# Altium PCB Bemine-neo_PCB.PcbDoc
Units mm, origin at the board's own origin, x right, y up, seen from the top; angles counter-clockwise.
Board outline 55.36 x 47 mm, 2 copper layers (Top Layer, Bottom Layer); 42 components, 31 nets, 174 pads, 26 vias.
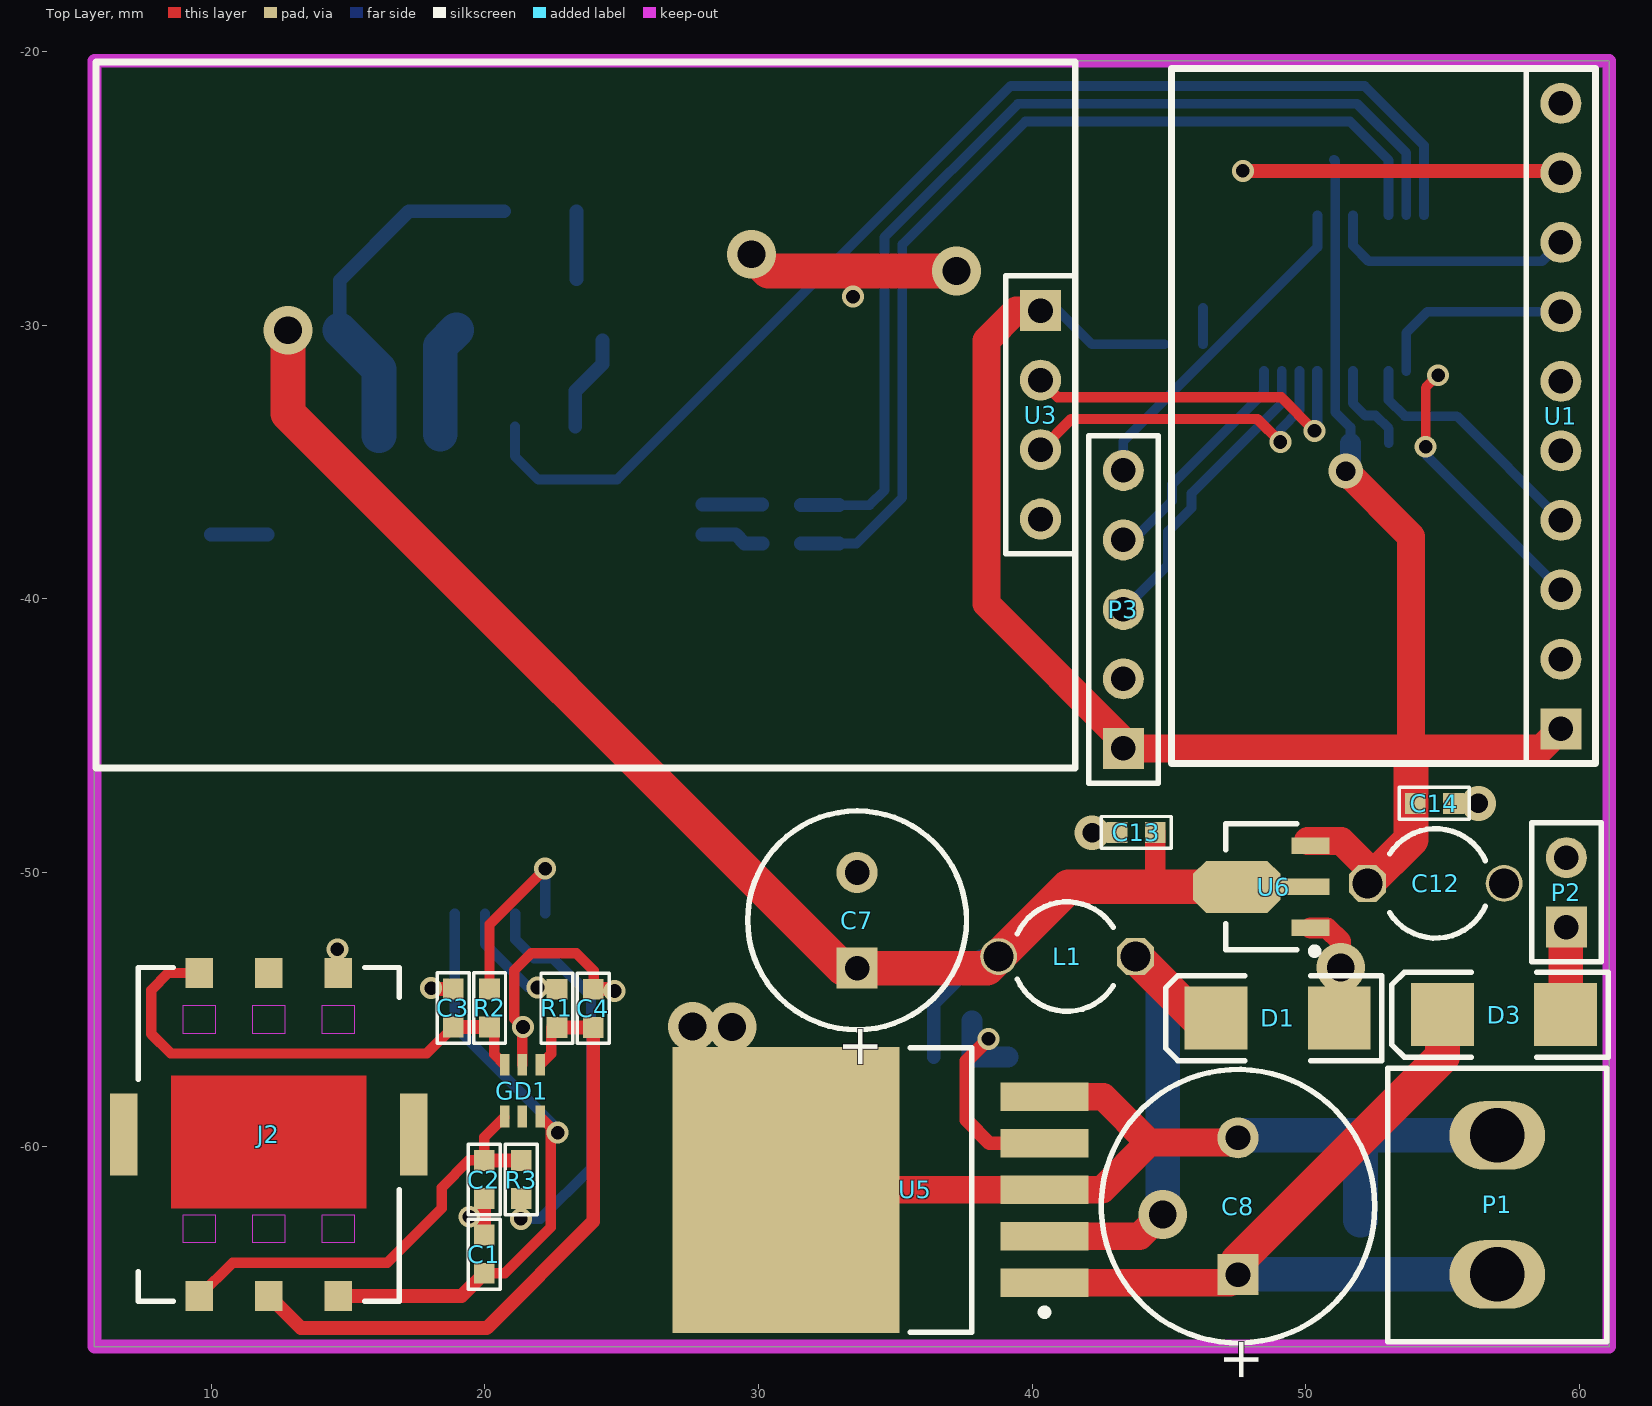
[diagram p0: Top Layer view]
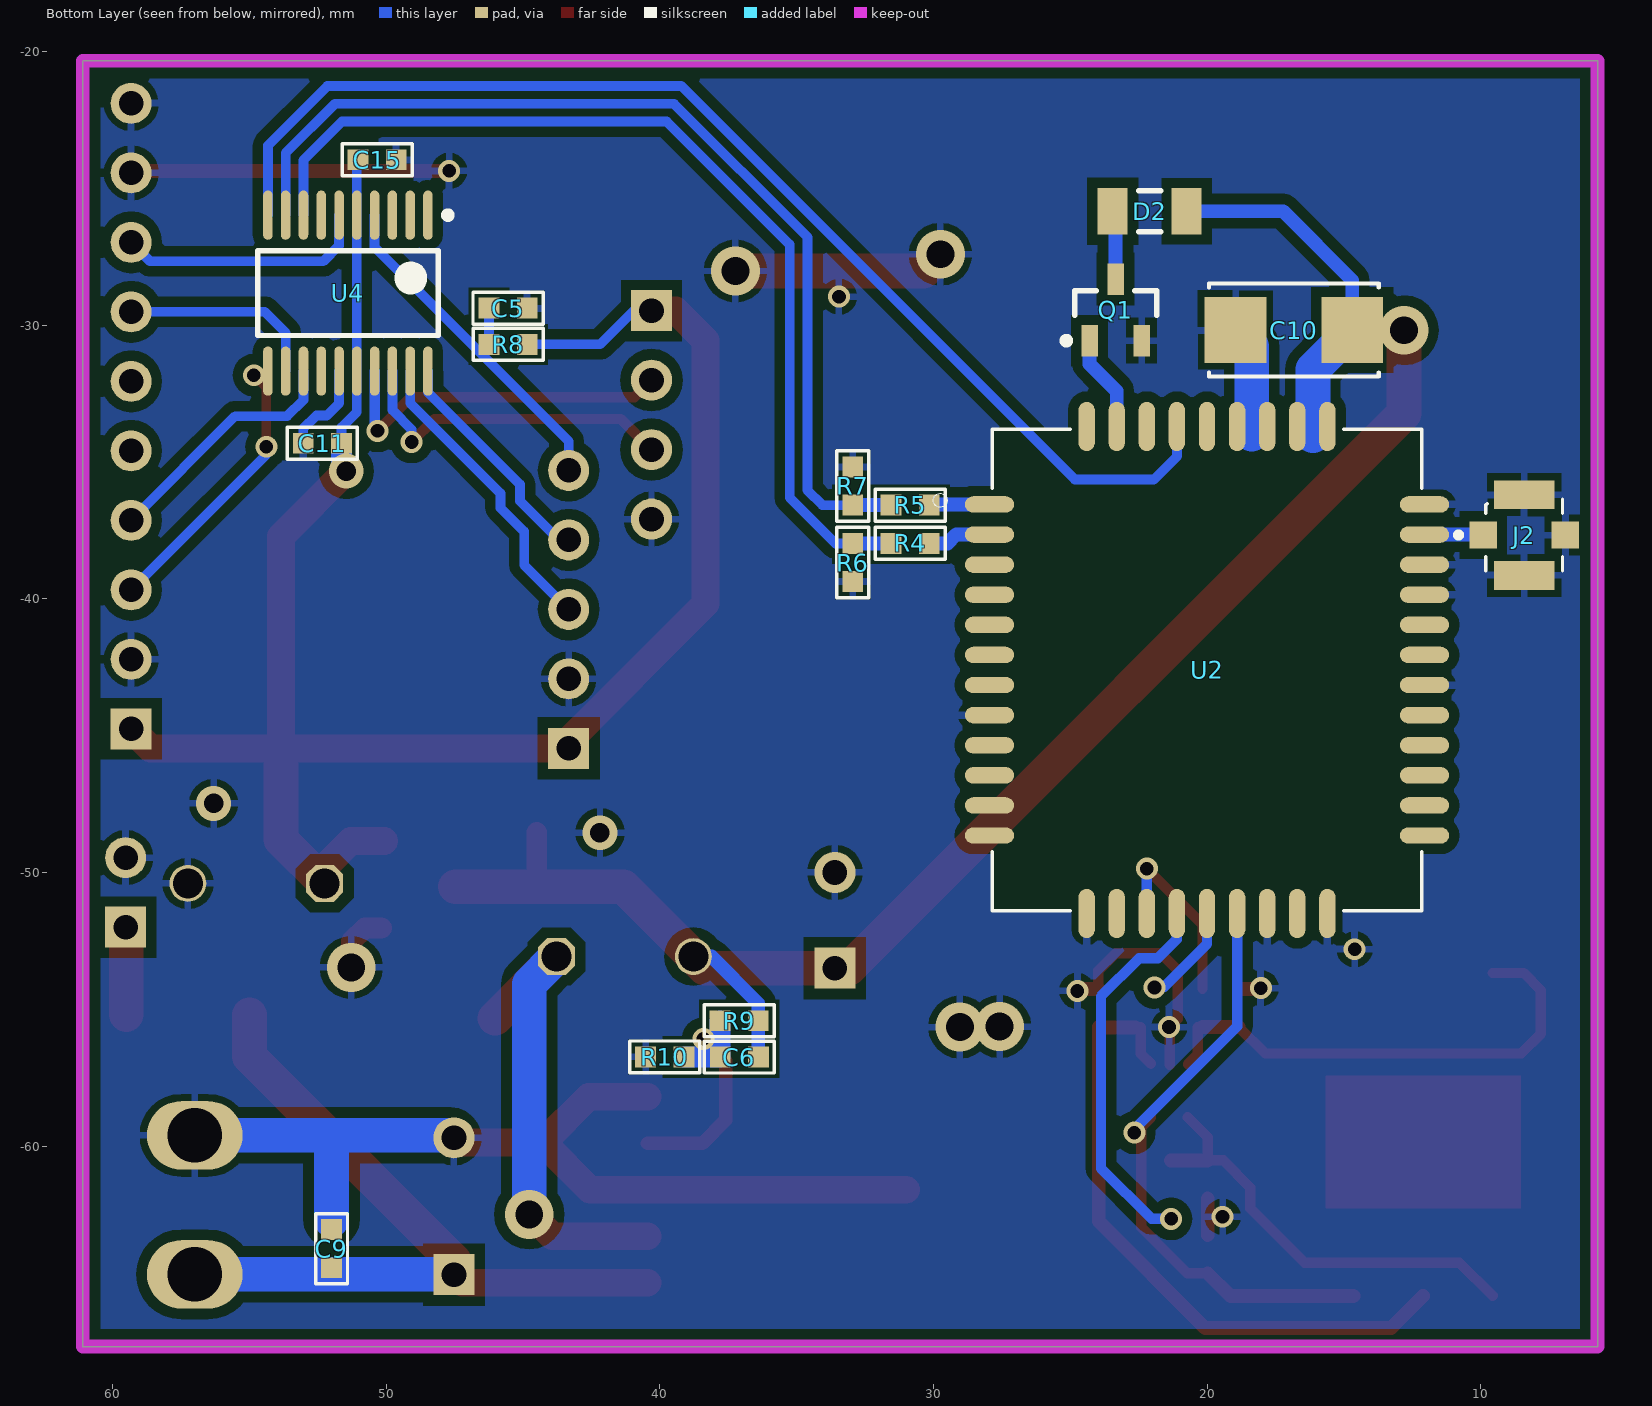
[diagram p1: Bottom Layer view, seen from below]

## Layer stack, top to bottom
Top Solder: solder mask 0.0102, Solder Resist, Dk 3.5
Top Layer: signal copper 0.0356
Dielectric 1: dielectric 0.32, FR-4, Dk 4.8
Bottom Layer: signal copper 0.0356
Bottom Solder: solder mask 0.0102, Solder Resist, Dk 3.5

## Board outline
5.727,-67.334 61.091,-67.334 61.091,-20.334 5.727,-20.334

## Design rules (kind name [scope] priority, off if disabled: settings)
Clearance Polygon [(InNamedPolygon('Top Layer-GND')) or (InNamedPolygon('Bottom Layer-GND'))] p1: gap=0.381
Clearance "Keep-Out Layer" [OnLayer('Keep-Out Layer')] p2: gap=0
Clearance [All] p3: gap=0.254
ComponentClearance [All] p1 off: gap=0.254 collisioncheckmode=3 verticalgap=0.254 showdistances=FALSE
PolygonConnect [All] p1: connectstyle=Relief reliefconductorwidth=0.254 reliefentries=4 polygonreliefangle="90 Angle" airgapwidth=0.254
RoutingVias [All] p1: holewidth=0.711 width=1.27 viastyle="Through Hole" minholewidth=0.711 minwidth=1.27 maxholewidth=0.711 maxwidth=1.27
SolderMaskExpansion [All] p1: expansion=0.102
Width [All] p1: maxlimit=1.27 minlimit=0.254 preferedwidth=0.254
29 further rules are at their usual default settings.

## Components (designator, comment, footprint, x,y, rotation, side; value= is the part's Value field where it differs from the comment)
C1 "100nF" 0603R-1k 19.975,-64.65 r90 top
C2 "33pF" 0603R-1k 19.975,-60.525 r270 top
C3 "33pF" 0603R-1k 18.841,-55.652 r90 top
C4 "33pF" 0603R-1k 23.956,-55.664 r90 top
C5 "100nF" 0603R-1k 46.245,-29.373 r180 bottom
C6 "15nF" 0603R-1k 37.793,-56.747 r180 bottom
C7 "470 μF; 25 V" E 33.6,-51.75 r90 top
C8 "1000uF 16V" F 47.525,-62.2 r90 top
C9 "100nF" 0603R-1k 52,-64.45 r90 bottom
C10 "10uF; 25V" CAPCP6032X280N 16.825,-30.175 r0 bottom
C11 "100nF" 0603R-1k 51.638,-34.315 r0 bottom
C12 "4.7 μF; 16V" CAPR5-4X5 54.75,-50.4 r0 top
C13 "100nF" 0603R-1k 44.501,-48.539 r180 top
C14 "100nF" 0603R-1k 54,-47.475 r0 top
C15 "100nF" 0603R-1k 51.029,-23.952 r180 bottom
D1 "SM5822" SMB 48.975,-55.325 r180 top
D2 "LED2" C1206 22.098,-25.832 r0 bottom
D3 "Diode" SMB 57.25,-55.2 r180 top
GD1 "SMF05C.TCT" SC70-6 21.369,-57.977 r180 top
J2 "1661" MOLEX_1661 8.407,-37.668 r270 bottom
J2 "SIM8050-6-0-14-00-X_revF" SIM8050-6-0-14-00-X_revF 12.1,-59.575 r0 top
L1 "68uH 3.1A (47 33)" CAPR5-4X5 41.275,-53.075 r180 top
P1 "12v_Power" phoenix-2pin-200mil 57,-62.15 r90 top
P2 "Battery Pins" HDR1X2 59.525,-52 r90 top
P3 "Programmer" HDR1X5 43.332,-45.466 r90 top
Q1 "N-channel MOSFET" SOT23 23.343,-29.439 r180 bottom
R1 "51" 0603R-1k 22.631,-55.664 r90 top
R2 "51" 0603R-1k 20.166,-55.652 r90 top
R3 "51" 0603R-1k 21.325,-60.525 r270 top
R4 "1K" 0603R-1k 30.15,-37.975 r0 bottom
R5 "1K" 0603R-1k 31.55,-36.575 r180 bottom
R6 "5.6K" 0603R-1k 32.95,-37.975 r270 bottom
R7 "5.6K" 0603R-1k 32.95,-36.575 r90 bottom
R8 "10K" 0603R-1k 44.845,-30.698 r0 bottom
R9 "4.7k; 1%" 0603R-1k 36.403,-55.42 r0 bottom
R10 "1k; 1%" 0603R-1k 39.123,-56.745 r0 bottom
U1 "mpu9250-module" mpu9250-module 59.325,-44.75 r180 top
U2 "SIM800C" LCC110P1570X1760X250-42N 20,-42.6 r180 bottom
U3 "NEO7-module" NEO7-module 41.575,-46.175 r90 top
U4 "STM32F030F4P6" STM-TSSOP20_N 51.4,-28.825 r270 bottom
U5 "LM2596S-ADJ" TS5B_N 34.45,-61.6 r180 top
U6 "AIC1734-33XA" SOT89N 48.375,-50.525 r180 top

## Footprints (in the part's own frame and the unit in brackets; to place one, negate y for a bottom-side part, rotate by r counter-clockwise, add the part's x,y. Pads: shape width x height; smd on the part's side, far side on the other; paste and mask are expansions set on the pad)
0603R-1k [mil] "RESISTOR 0603"
  rect 30x30 smd: 1(0,0) 2(55,0)
  silkscreen extent -23,-23 78,23, body extent -4,-15 59,15, height 20
C1206 [mm]
  rect 1.1x1.7 smd: 1(-1.35,0) 2(1.35,0)
  silkscreen extent -0.4,-0.75 0.4,0.75, body extent -1.7,-0.9 1.7,0.9, height 1.3
CAPCP6032X280N [mil]
  rect 89x95 smd: 1(-84,0) 2(84,0)
  silkscreen extent -122,-67 122,67
CAPR5-4X5 [mm]
  oct 1.35x1.35 hole 1.1: 1(-2.5,0)
  round 1.35 hole 1.1: 2(2.5,0)
  silkscreen extent -1.69,-2 1.82,2
E [mm] "Capacitor, Electrolytic, Radial; Body 8 x 10.5 mm (Dia.xH typ); Pin Spacing 3.5 mm (typ)"
  rect 1.5x1.5 hole 0.9: 1(-1.75,0)
  round 1.5 hole 0.9: 2(1.75,0)
  silkscreen extent -4,-4 4,4
F [mm] "Capacitor, Electrolytic, Radial; Body 10 x 10.5 mm (Dia.xH typ); Pin Spacing 5 mm (typ)"
  rect 1.5x1.5 hole 0.9: 1(-2.5,0)
  round 1.5 hole 0.9: 2(2.5,0)
  silkscreen extent -5,-5 5,5
HDR1X2 [mm] "Connector; Header; 2 Position"
  rect 1.5x1.5 hole 0.9: 1(0,0)
  round 1.5 hole 0.9: 2(2.54,0)
  silkscreen extent -1.27,-1.27 3.81,1.27
HDR1X5 [mm] "Connector; Header; 5 Position"
  rect 1.5x1.5 hole 0.9: 1(0,0)
  round 1.5 hole 0.9: 2(2.54,0) 3(5.08,0) 4(7.62,0) 5(10.16,0)
  silkscreen extent -1.27,-1.27 11.43,1.27
LCC110P1570X1760X250-42N [mm]
  oval 1.8x0.6 smd: 1(-7.95,6.05) 2(-7.95,4.95) 3(-7.95,3.85) 4(-7.95,2.75) 5(-7.95,1.65) 6(-7.95,0.55) 7(-7.95,-0.55) 8(-7.95,-1.65) 9(-7.95,-2.75) 10(-7.95,-3.85) 11(-7.95,-4.95) 12(-7.95,-6.05) 22(7.95,-6.05) 23(7.95,-4.95) 24(7.95,-3.85) 25(7.95,-2.75) 26(7.95,-1.65) 27(7.95,-0.55) 28(7.95,0.55) 29(7.95,1.65) 30(7.95,2.75) 31(7.95,3.85) 32(7.95,4.95) 33(7.95,6.05)
  oval 0.6x1.8 smd: 13(-4.4,-8.9) 14(-3.3,-8.9) 15(-2.2,-8.9) 16(-1.1,-8.9) 17(0,-8.9) 18(1.1,-8.9) 19(2.2,-8.9) 20(3.3,-8.9) 21(4.4,-8.9) 34(4.4,8.9) 35(3.3,8.9) 36(2.2,8.9) 37(1.1,8.9) 38(0,8.9) 39(-1.1,8.9) 40(-2.2,8.9) 41(-3.3,8.9) 42(-4.4,8.9)
  silkscreen extent -10,-8.8 7.85,8.8
MOLEX_1661 [mm]
  rect 1x1 smd: 1(0,-1.5) 3(0,1.5)
  rect 1.05x2.2 smd: 2(-1.475,0) 4(1.475,0)
  silkscreen extent -1.3,-2.5 1.3,1.4
mpu9250-module [mm]
  rect 1.5x1.5 hole 0.9: 1(0,0)
  round 1.5 hole 0.9: 2(0,-2.54) 3(0,-5.08) 4(0,-7.62) 5(0,-10.16) 6(0,-12.7) 7(0,-15.24) 8(0,-17.78) 9(0,-20.32) 10(0,-22.86)
  silkscreen extent -1.27,-24.13 14.23,1.27
NEO7-module [mm]
  rect 1.5x1.5 hole 0.9: 1(16.71,1.27)
  round 1.5 hole 0.9: 2(14.17,1.27) 3(11.63,1.27) 4(9.09,1.27)
  silkscreen extent 0,0 25.8,35.8
phoenix-2pin-200mil [mm]
  oval 2.5x3.5 hole 2: 1(-2.54,0) 2(2.54,0)
  silkscreen extent -5,-4 5,4
SC70-6 [mm]
  rect 0.35x0.8 smd: 1(-0.65,-0.95) 2(0,-0.95) 3(0.65,-0.95) 4(0.65,0.95) 5(0,0.95) 6(-0.65,0.95)
SIM8050-6-0-14-00-X_revF [mm]
  rect 1x1.1 smd: C1(2.54,-5.9) C2(0,-5.9) C3(-2.54,-5.9) C5(2.54,5.9) C6(0,5.9) C7(-2.54,5.9)
  rect 1x3 smd: C4(5.3,0) C8(-5.3,0)
  Top Layer region: -3.575,-2.7 3.575,-2.7 3.575,2.15 -3.575,2.15
  Top Layer keep-out region: 1.94,-3.95 3.14,-3.95 3.14,-2.95 1.94,-2.95
  Top Layer keep-out region: -0.6,-3.95 0.6,-3.95 0.6,-2.95 -0.6,-2.95
  Top Layer keep-out region: -3.14,-3.95 -1.94,-3.95 -1.94,-2.95 -3.14,-2.95
  Top Layer keep-out region: -3.14,3.7 -1.94,3.7 -1.94,4.7 -3.14,4.7
  Top Layer keep-out region: -0.6,3.7 0.6,3.7 0.6,4.7 -0.6,4.7
  Top Layer keep-out region: 1.94,3.7 3.14,3.7 3.14,4.7 1.94,4.7
  silkscreen extent -4.77,-6.1 4.77,6.1, body extent -5.42,-6.1 5.42,6.1, height 1.34
SMB [mm]
  rect 2.3x2.3 smd: 1(-2.25,0) 2(2.25,0)
  silkscreen extent -3.8,-1.55 4.1,1.55
SOT23 [mm]
  rect 0.6x1.15 smd: 1(-0.95,-1.125) 2(0.95,-1.125) 3(0,1.125)
  silkscreen extent -1.92,-1.25 1.5,0.7, body extent -1.5,-0.7 1.5,0.7, height 1.1
SOT89N [mm]
  rect 1.4x0.6 smd: 1(-1.8,1.5) 3(-1.8,-1.5)
  rect 1.8x0.6 smd: 2(-1.6,0)
  oct 3.2x1.9 smd: 2(0.9,0)
  silkscreen extent -2.07,-2.3 1.3,2.47, body extent -1.3,-2.3 1.3,2.3, height 1.6
STM-TSSOP20_N [mm] "SOP, 20-Leads, Body 6.6x4.5mm, Pitch 0.65mm, IPC Medium Density"
  oval 1.8x0.35 smd: 1(-2.85,2.925) 2(-2.85,2.275) 3(-2.85,1.625) 4(-2.85,0.975) 5(-2.85,0.325) 6(-2.85,-0.325) 7(-2.85,-0.975) 8(-2.85,-1.625) 9(-2.85,-2.275) 10(-2.85,-2.925) 11(2.85,-2.925) 12(2.85,-2.275) 13(2.85,-1.625) 14(2.85,-0.975) 15(2.85,-0.325) 16(2.85,0.325) 17(2.85,0.975) 18(2.85,1.625) 19(2.85,2.275) 20(2.85,2.925)
  silkscreen extent -2.97,-3.3 1.55,3.77, body extent -2.25,-3.3 2.25,3.3, height 1.2
TS5B_N [mm]
  rect 3.2x1.05 smd: 1(-6,3.4) 2(-6,1.7) 3(-6,0) 4(-6,-1.7) 5(-6,-3.4)
  rect 8.3x10.45 smd: 6(3.45,0)
  silkscreen extent -6.13,-5.2 -1.1,5.2, body extent -3.35,-5.2 6.05,5.2, height 4.65

## Part data
C1 C2 C3 C4 C5 C9 C11 C13 C14 C15: library part Cap-Bipolar, "Bipolar Capacitor"
C6 C10: library part Cap, "Capacitor"
C7: library part 94SH107X0016EBP, "Solid Aluminum Capacitor with Organic Semiconductor Electrolyte: 100uF, 16V, Bulk Pack"
C8: library part 94SS477X0004FBP, "Solid Aluminum Capacitor with Organic Semiconductor Electrolyte: 470uF, 4V, Bulk Pack"
C12: library part "WCAP-PSLP 5x5.8x1.4 875105359003", "WCAP-PSLP Aluminum Polymer Capacitors , 22 ?F; + / - 20%; 16 V , 5 x 5,8"
D1: library part "D Schottky", "Schottky Diode"
D2: "Typical RED, GREEN, YELLOW, AMBER GaAs LED"
D3: "Default Diode"
J2: "uFL SMT Antenna Connector"
J2: "Nano SIM Card Connector, Push-Pull Type, 6 Pin, SMT, Profile 1.35mm"
L1: library part Inductor, "Inductor"
P1 P2: library part "Header 2", "Header, 2-Pin"
P3: library part "Header 5", "Header, 5-Pin"
Q1: library part 2N7002, "NPN transistor"
R1 R2 R3 R4 R5 R6 R7 R8 R9 R10: library part Resistor, "Resistor"
U2: "Module: GSM/Bluetooth; GPRS; 2G; 1800MHz, 900MHz; 85.6kbps; SMD"
U4: "ARM Cortex-M0 32-bit MCU, 16 KB Flash, 4 KB Internal RAM, 15 I/Os, 20-pin TSSOP, -40 to 85 degC, Tube"
U5: "SIMPLE SWITCHER® Power Converter 150 KHz 3A Step-Down Voltage Regulator, 5-pin TO-263"
U6: library part HT7530-1, "3.0V 100mA Low Power,  Low Dropout Voltage (LDO) Regulator"

## Via types
v1: diameter 0.8, hole 0.5, Top Layer to Bottom Layer, 16 vias
v2: diameter 1.778, hole 1.016, Top Layer to Bottom Layer, 7 vias
v3: diameter 1.27, hole 0.711, Top Layer to Bottom Layer, 3 vias

## Nets (pads, with @x,y where several pads share a name; then routed paths per layer and width w, separated by ;. In a path a pad name is that pad's centre, name@x,y a point inside that pad or via, vN(x,y) a via of type N, cw(c..) or ccw(c..) an arc to the next point about the centre after c; other vN are vias at no path point)
GND: C1.2 C2.2 C3.2 C4.2 C5.2 C7.2 C8.2 C9.2 C10.2 C11.2 C12.2 C13.2 C14.2 C15.2 D1.1 GD1.2 J2.2 J2.3 J2.4 J2.C5 P1.2 P2.2 P3.2 Q1.2 R6.2 R7.2 R10.2 U1.2 U1.9 U1.10 U2.8 U2.13 U2.19 U2.21 U2.27 U2.30 U2.31 U2.33 U2.36 U2.37 U3.4 U4.15 U5.3 U5.5 U5.6 U6.1 | length 73.8
  Top Layer w0.381: GD1.2 v1@21.369,-55.669 ; v1(21.387,-55.651) 21.076,-55.34 21.076,-53.575 21.692,-52.959 23.343,-52.959 23.978,-53.594 C4.2@23.978,-54.153
  Top Layer w0.508: v1@18.085,-54.255 C3.2 ; C1.2 C2.2 ; C4.2 v1@24.727,-54.267 ; v1(47.701,-24.359) 59.254,-24.359 U1.9
  Top Layer w0.762: U6.1 50.777,-52.025 51.281,-52.529 v2(51.281,-53.473)
  Top Layer w1.016: U5.6 U5.3 42.55,-61.6 44.275,-59.875 ; U5.5 42.6,-58.2 44.275,-59.875 ; C8.2 47.35,-59.875 44.275,-59.875
  Top Layer w1.27: v2(29.743,-27.407) 30.353,-28.016 v2(37.236,-28.016)
  Bottom Layer w0.356: U4.15 51.725,-32.853 52.172,-33.299 52.553,-33.299 53.035,-33.782 C11.2
  Bottom Layer w1.27: 18.364,-33.985 18.364,-30.769 C10.2 ; C8.2@47.615,-59.61 P1.2 ; C9.2@52,-62.7 52,-59.66
  other v1: 19.431,-62.586 24.74,-54.331 18.034,-54.229 14.605,-52.807 33.452,-28.956
  other v2: 29.032,-55.651 27.583,-55.632
  other v3: 42.188,-48.546 56.31,-47.479
INT: U1.8 U4.6 | length 9.2
  Bottom Layer w0.356: U4.6 51.725,-27.087 52.299,-27.661 58.634,-27.661 U1.8
MISO: U1.7 U4.12 | length 7.4
  Bottom Layer w0.356: U4.12 53.675,-30.272 54.437,-29.51 U1.7
MOSI: U1.4 U4.13 | length 9.2
  Bottom Layer w0.356: U4.13 53.025,-32.73 53.619,-33.325 55.52,-33.325 U1.4
NetC2_1: C2.1 GD1.4 J2.C3 R3.1 | length 16.1
  Top Layer w0.381: J2.C3 10.773,-64.262 16.434,-64.262 18.415,-62.281 18.415,-61.519 19.409,-60.525 C2.1 19.975,-59.671 GD1.4@20.697,-58.949
  Top Layer w0.508: C2.1 R3.1
NetC3_1: C3.1 GD1.3 J2.C7 R2.1 | length 18.2
  Top Layer w0.381: J2.C7 8.428,-53.675 7.798,-54.305 7.798,-55.905 8.509,-56.617 17.877,-56.617 C3.1 ; R2.1@20.344,-55.652 20.344,-56.652 GD1.3@20.695,-57.003
  Top Layer w0.508: C3.1 R2.1
NetC4_1: C4.1 GD1.1 J2.C2 R1.1 | length 23.9
  Top Layer w0.381: GD1.1@22.048,-56.998 22.419,-56.627 R1.1@22.419,-55.652
  Top Layer w0.508: J2.C2 13.275,-66.65 20.066,-66.65 23.956,-62.759 C4.1@23.956,-55.651 ; R1.1 C4.1
NetC6_1: C6.1 R9.2 R10.1 U5.4 | length 9.2
  Top Layer w0.508: v1(38.405,-56.083) 37.592,-56.896 37.592,-59.055 38.437,-59.9 U5.4
  Bottom Layer w0.762: R9.2 37.8,-56.74 R10.1@39.118,-56.74
NetD1_2: D1.2 L1.1 U5.2 | length 17.7
  Top Layer w1.016: U5.2 43.925,-63.3 v2@44.75,-62.475
  Top Layer w1.27: L1.1 D1.2@46.025,-55.325
  Bottom Layer w1.27: L1.1 44.775,-54.075 v2(44.775,-62.5)
NetD2_2: D2.2 Q1.3 | length 2.5
  Bottom Layer w0.508: Q1.3 D2.2@23.343,-25.832
NetD3_1: D3.1 P2.1 | length 3.2
  Top Layer w1.27: D3.1 P2.1@59.5,-52.025
NetJ2_1: J2.1 U2.32 | length 2.1
  Bottom Layer w0.508: J2.1@9.975,-37.65 U2.32
NetQ1_1: Q1.1 U2.41 | length 3.5
  Bottom Layer w0.508: U2.41 23.3,-32.402 24.293,-31.41 Q1.1
NetR4_1: R4.1 U2.2 | length 2.3
  Bottom Layer w0.508: U2.2 29.166,-37.65 29.491,-37.975 R4.1
NetR5_2: R5.2 U2.1 | length 2.2
  Bottom Layer w0.508: U2.1 R5.2@30.128,-36.55
NRST: C5.1 P3.5 R8.2 U4.4 | length 13.6
  Bottom Layer w0.356: P3.5 43.332,-34.239 50.425,-27.147 U4.4 ; R8.2@46.245,-30.695 C5.1
PWRKEY: U2.39 U4.10 | length 44.1
  Bottom Layer w0.356: U2.39 21.1,-34.791 21.946,-35.636 24.832,-35.636 39.213,-21.255 52.151,-21.255 54.325,-23.429 U4.10
RX: R5.1 R7.1 U4.9 | length 36.6
  Bottom Layer w0.356: R7.1 34.062,-36.575 34.605,-36.032 34.605,-26.782 39.482,-21.905 51.882,-21.905 53.675,-23.698 U4.9
  Bottom Layer w0.508: R5.1 R7.1
RX_REMAP: U3.3 U4.18 | length 12.5
  Top Layer w0.381: U3.3 41.424,-33.426 48.235,-33.426 v1(49.073,-34.265)
  Bottom Layer w0.356: v1(49.073,-34.265) 49.073,-33.807 49.775,-33.105 U4.18
SCK: U1.3 U4.11 | length 10.1
  Top Layer w0.356: v1(54.381,-34.442) 54.381,-32.283 v1(54.839,-31.826)
  Bottom Layer w0.356: v1(54.381,-34.442) 54.381,-34.726 U1.3
SIM_CLK: R3.2 U2.16 | length 14.2
  Bottom Layer w0.381: U2.16 21.1,-52.444 21.793,-53.137 22.479,-53.137 23.876,-54.534 23.876,-60.808 22.022,-62.662 v1(21.311,-62.662)
SIM_DATA: R2.2 U2.15 | length 7
  Top Layer w0.381: R2.2 20.166,-51.894 22.073,-49.987 v1@22.073,-49.733
  Bottom Layer w0.381: U2.15 v1(22.2,-49.86)
SIM_RST: R1.2 U2.17 | length 3.7
  Bottom Layer w0.381: U2.17 20,-52.614 21.565,-54.178 v1@21.92,-54.178
  other v1: 21.92,-54.204
SIM_VDD: C1.1 GD1.6 J2.C1 U2.18 | length 22.5
  Top Layer w0.381: C1.1 20.719,-64.65 22.403,-62.967 22.403,-59.311 GD1.6@22.046,-58.954
  Top Layer w0.508: J2.C1 19.15,-65.475 C1.1
  Bottom Layer w0.381: U2.18 18.9,-55.628 v1@22.72,-59.449
  other v1: 22.657,-59.512
SWCLK: P3.4 U4.20 | length 8.2
  Bottom Layer w0.356: P3.4@43.688,-37.846 45.11,-36.424 45.11,-35.814 48.475,-32.449 U4.20
SWDIO: P3.3 U4.19 | length 11.1
  Bottom Layer w0.356: P3.3 44.958,-38.76 44.958,-37.541 45.822,-36.678 45.822,-36.144 49.125,-32.841 U4.19
TX: R4.2 R6.1 U4.8 | length 35.9
  Bottom Layer w0.356: R6.1 33.582,-37.975 35.255,-36.301 35.255,-27.051 39.751,-22.555 51.613,-22.555 53.025,-23.967 U4.8
  Bottom Layer w0.508: R4.2 R6.1
TX_REMAP: U3.2 U4.17 | length 12.9
  Top Layer w0.381: U3.2 40.939,-32.639 49.098,-32.639 v1(50.317,-33.858)
  Bottom Layer w0.381: v1@50.425,-33.751 U4.17
V3.3: C11.1 C12.1 C14.1 C15.1 P3.1 R8.1 U1.1 U3.1 U4.5 U4.16 U6.3 | length 72.2
  Top Layer w1.016: U3.1 39.42,-29.465 38.329,-30.556 38.329,-40.183 43.612,-45.466 53.848,-45.466 ; U6.3@50.075,-48.85 51.3,-48.85 52.25,-49.8 C12.1 ; v3(51.46,-35.331) 53.848,-37.719 53.848,-45.466 ; U1.1 58.609,-45.466 53.848,-45.466
  Top Layer w1.27: C12.1 53.848,-48.802 53.848,-45.466
  Bottom Layer w0.356: U3.1 40.946,-29.465 42.179,-30.698 R8.1 ; C15.1 51.075,-23.999 U4.5 U4.16 51.075,-33.168 51.638,-33.731 C11.1
  Bottom Layer w0.762: v3(51.46,-35.331) 51.638,-35.154 C11.1
V12: C8.1 C9.1 D3.2 P1.1 U5.1 | length 29.3
  Top Layer w1.016: U5.1 47.225,-65 C8.1
  Top Layer w1.27: C8.1 47.525,-64.2 55,-56.725 D3.2
  Bottom Layer w1.27: C8.1@47.535,-64.69 P1.1
VBAT: C6.2 C7.1 C10.1 C13.1 D2.1 L1.2 R9.1 U2.34 U2.35 U6.2 | length 67.5
  Top Layer w0.762: 44.501,-50.296 C13.1
  Top Layer w1.27: v2(12.8,-30.182) 12.8,-33.222 33.078,-53.5 38.35,-53.5 L1.2 41.325,-50.525 U6.2@47.475,-50.525
  Bottom Layer w0.508: C10.1 14.691,-28.362 17.221,-25.832 D2.1@20.701,-25.832 ; C6.2@36.403,-56.74 R9.1 36.403,-54.783 38.111,-53.075 L1.2
  Bottom Layer w1.27: C10.1 16.129,-31.613 16.129,-34.036
pads on no net: GD1.5 J2.C4 J2.C6 J2.C8 U1.5 U1.6 U2.3 U2.4 U2.5 U2.6 U2.7 U2.9 U2.10 U2.11 U2.12 U2.14 U2.20 U2.22 U2.23 U2.24 U2.25 U2.26 U2.28 U2.29 U2.38 U2.40 U2.42 U4.1 U4.2 U4.3 U4.7 U4.14

## Polygon pours and split planes (outlines as drawn)
GND on Bottom Layer "Bottom Layer-GND" (solid, pour order 0): 5.727,-20.334 5.727,-67.334 61.091,-67.334 61.091,-20.334

## Keep-outs
Keep-Out Layer:
  the board outline again, w0.508

## Other copper
Top Layer:
  pour cut-out: 6.68,-53.475 6.68,-65.675 17.52,-65.675 17.52,-53.475
Bottom Layer:
  pour cut-out: 12.15,-33.8 12.15,-51.4 27.85,-51.4 27.85,-33.8

## Text inside footprints (layer, text, board x,y; h text height)
C7: Top Overlay "+" at 34.35,-57.225 h1.5 r90
C8: Top Overlay "+" at 48.275,-68.675 h1.5 r90